# EAGLE board bbotsv2 (EAGLE 9.6.2)
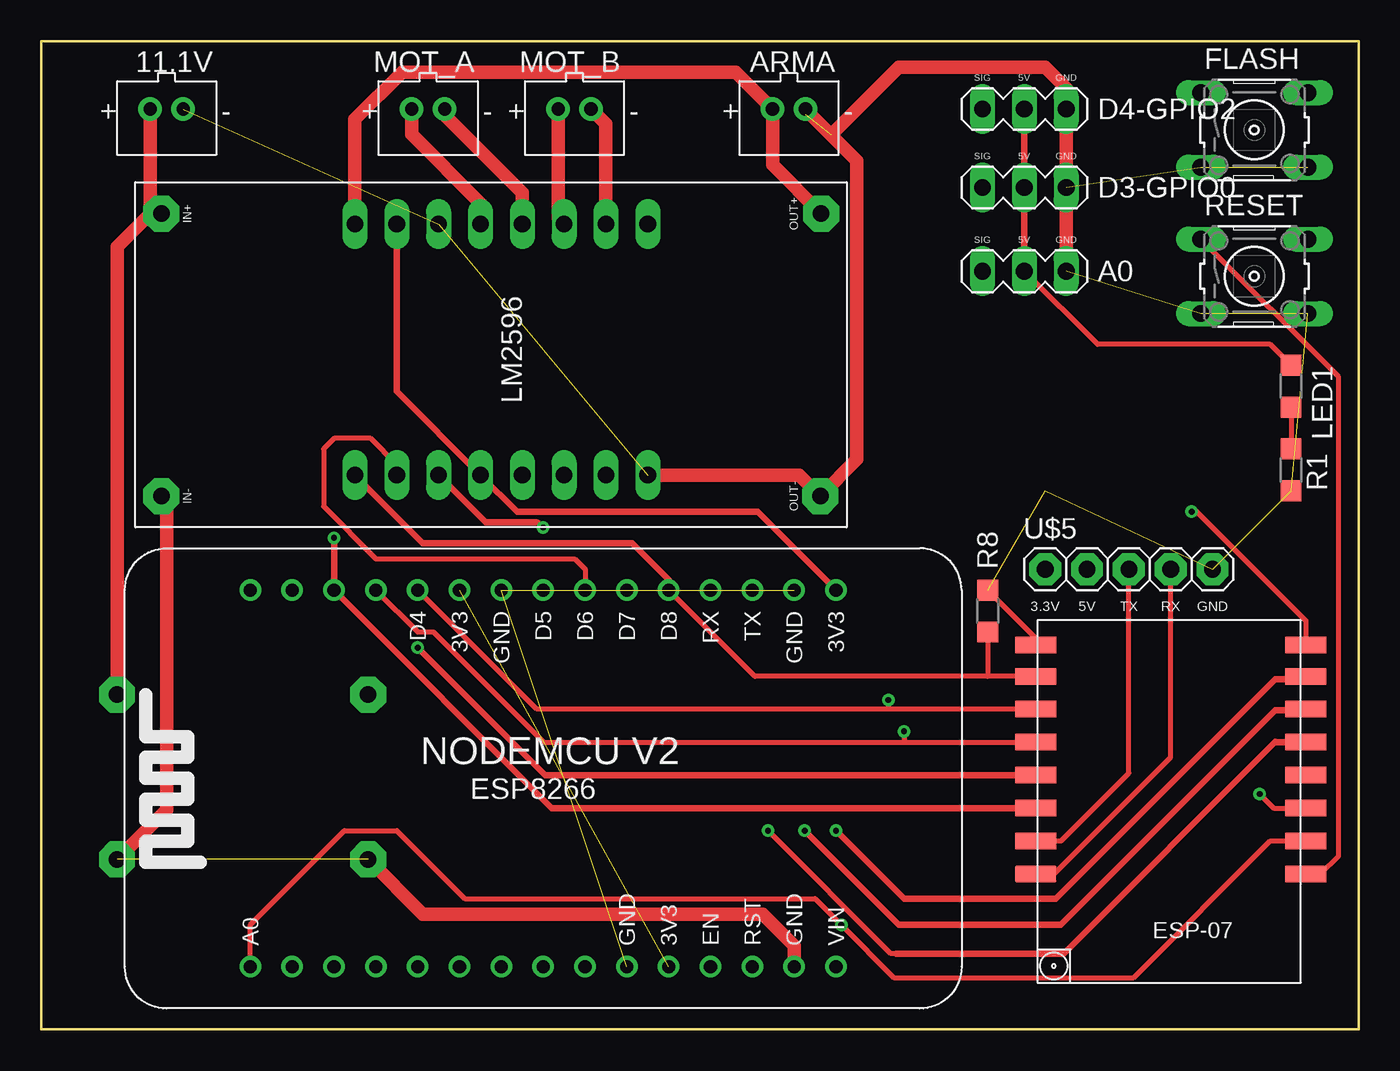
[diagram p0: board, top side]
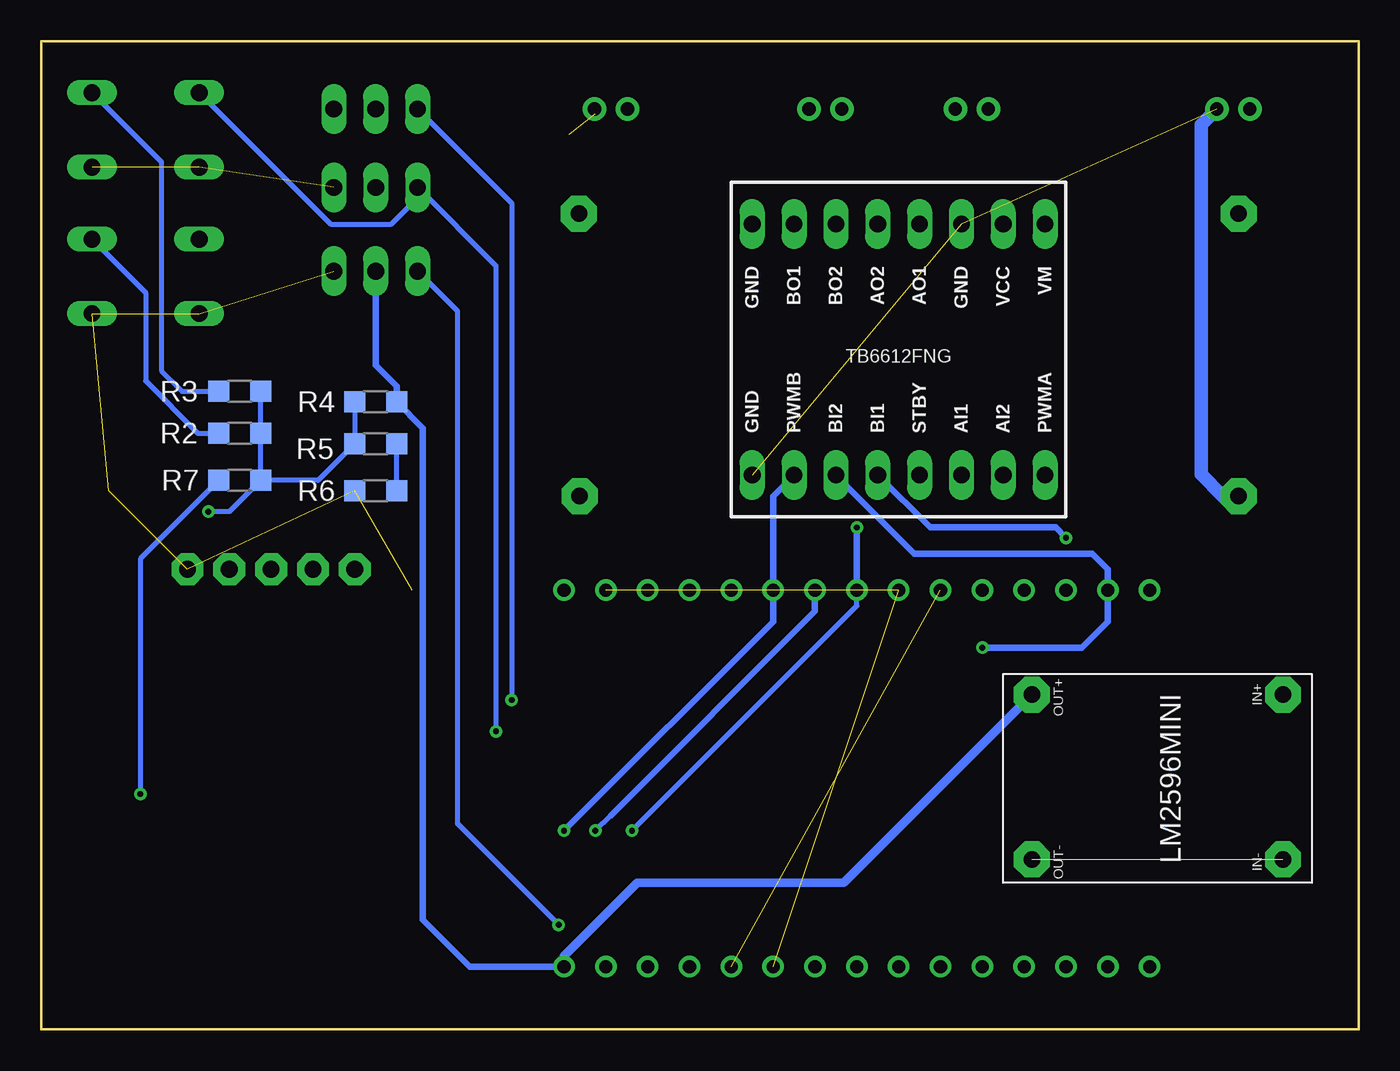
[diagram p1: board, bottom side, seen from below]

Size 80 x 60 mm. Coordinates in mm from the lower left corner, seen from the top.
Outline: 0,60 0,0 80,0 80,60 0,60
Copper layers (1*16): Top 0.035mm / dielectric 1.5mm / Bottom 0.035mm
Design rules "default": minimum track width 6mil, minimum drill 0.35mm, track to track 6mil, track to pad 6mil, pad to pad 6mil, via to via 6mil, smd to smd 6mil, copper to edge 40mil, drill to drill 6mil, minimum pad ring 10mil, minimum via ring 8mil, stop-mask expansion 4mil, vias tented up to drill 0mil, thermal gap 10mil

## Footprints (pad centres in the part's own frame; a part is rotated, then mirrored left to right if it is on the bottom)
JST-PH-2-THM = drill 0.8 pad 1.422: 1 1,0; 2 -1,0
BB-PIN3 = drill 1.016 long: 1 -2.54,0; 2 0,0; 3 2.54,0
B3F-10XX = drill 1.016 long: 1 -3.251,2.261; 2 3.251,2.261; 3 -3.251,-2.261; 4 3.251,-2.261
M0805 = smd 1.27 x 1.27: 1 -1.27,0; 2 1.27,0
NODEMCU_ESP8266 = drill 0.8: 3V3@1 -11.43,19.05; 3V3@2 -11.43,-3.81; 3V3@3 11.43,8.89; A0 11.43,-16.51; CLK 11.43,3.81; CMD 11.43,-1.27; D0 -11.43,-16.51; D1 -11.43,-13.97; D2 -11.43,-11.43; D3 -11.43,-8.89; D4 -11.43,-6.35; D5 -11.43,1.27; D6 -11.43,3.81; D7 -11.43,6.35; D8 -11.43,8.89; EN 11.43,11.43; GND@1 -11.43,16.51; GND@2 -11.43,-1.27; GND@3 11.43,6.35; GND@4 11.43,16.51; RST 11.43,13.97; RSV1 11.43,-11.43; RSV2 11.43,-13.97; RX -11.43,11.43; SD1 11.43,-3.81; SD2 11.43,-6.35; SD3 11.43,-8.89; SDO 11.43,1.27; TX -11.43,13.97; VIN 11.43,19.05
BB-LM2596 = drill 1 pad 2.184 octagon: IN+ 1.905,1.587; IN- 19.05,1.587; OUT+ 1.905,41.643; OUT- 19.05,41.593
BB-TB6612 = drill 1.016 long: AI1 7.62,3.81; AI2 7.62,6.35; AO1 -7.62,1.27; AO2 -7.62,-1.27; BI1 7.62,-1.27; BI2 7.62,-3.81; BO1 -7.62,-6.35; BO2 -7.62,-3.81; GND -7.62,3.81; GND2 -7.62,-8.89; GND3 7.62,-8.89; PWMA 7.62,8.89; PWMB 7.62,-6.35; STBY 7.62,1.27; VCC -7.62,6.35; VM -7.62,8.89
ESP07-16PIN = smd 2.5 x 1: ADC -8.2,3.8; CH_PD -8.2,1.8; GND 8.2,-8.105; GPIO0 8.2,-2.2; GPIO2 8.2,-4.2; GPIO4 8.2,1.8; GPIO5 8.2,-0.2; GPIO12 -8.2,-4.2; GPIO13 -8.2,-6.2; GPIO14 -8.2,-2.2; GPIO15 8.2,-6.2; GPIO16 -8.2,-0.2; REST -8.2,5.8; RX 8.2,3.8; TX 8.2,5.8; VCC -8.2,-8.105
BB-LM2596MINI = drill 1 pad 2.184 octagon: IN+ 1.27,16.986; IN- 11.271,16.986; OUT+ 1.27,1.746; OUT- 11.271,1.746
1X05 = drill 1.016 pad 1.93 octagon: 3.3V -5.08,0; 5V -2.54,0; GND 5.08,0; RX 2.54,0; TX 0,0

## Placement (x,y rotation side)
11.1V  [JST-PH-2-THM]  7.62,55.88 180 top
A0  BB-PIN3  [BB-PIN3]  59.69,46.04 180 top
ARMA  [JST-PH-2-THM]  45.4,55.88 180 top
D3-GPIO0  BB-PIN3  [BB-PIN3]  59.69,51.12 180 top
D4-GPIO2  BB-PIN3  [BB-PIN3]  59.69,55.88 180 top
FLASH  [B3F-10XX]  73.66,54.61 0 top
LED1  [M0805]  75.88,39.05 270 top
MOT_A  [JST-PH-2-THM]  23.5,55.88 180 top
MOT_B  [JST-PH-2-THM]  32.38,55.88 180 top
NODE1  NODEMCU_ESP8266  [NODEMCU_ESP8266]  29.21,15.24 270 top
R1  1k  [M0805]  75.88,33.97 90 top
R2  10k  [M0805]  67.94,36.2 180 bottom
R3  10k  [M0805]  67.94,38.73 180 bottom
R4  10k  [M0805]  59.69,38.1 0 bottom
R5  10k  [M0805]  59.69,35.56 180 bottom
R6  10k  [M0805]  59.69,32.7 0 bottom
R7  10k  [M0805]  67.94,33.34 0 bottom
R8  10k  [M0805]  57.47,25.4 90 top
RESET  [B3F-10XX]  73.66,45.72 0 top
U$1  BB-LM2596  [BB-LM2596]  5.71,51.44 270 top
U$2  BB-TB6612  [BB-TB6612]  27.94,41.27 270 bottom
U$3  ESP07-16PIN  [ESP07-16PIN]  68.58,15.24 180 top
U$4  BB-LM2596MINI  [BB-LM2596MINI]  21.59,21.59 270 bottom
U$5  BB-USBTTL  [1X05]  66.04,27.94 0 top

## Library data of the parts
11.1V ARMA MOT_A MOT_B = adafruit
A0 D3-GPIO0 D4-GPIO2 U$1 U$2 U$4 U$5 = my-library
FLASH RESET = switch-omron; MPN: B3F-1000; OC_FARNELL: 176432; OC_NEWARK: 36M3542
LED1 R1-R8 = my-library; SPICEPREFIX: R
NODE1 = nodemcu_esp8266
U$3 = esp8266modules; DIMENSIONS: 22.0 x 16.0 mm; PINS: 16; PITCH: 0.078" / 2 mm

## Nets
3.3: R2.1 R3.1 R4.1 R5.2 R7.2 U$3.VCC
3V3: NODE1.3V3@2 NODE1.3V3@3
5V: A0.2 D3-GPIO0.2 D4-GPIO2.2 LED1.1 NODE1.VIN R4.2 U$4.OUT+
11.1: 11.1V.1 U$1.IN+ U$4.IN+
12V: ARMA.1 U$1.OUT+ U$2.VM
GND: NODE1.GND@1 NODE1.GND@2 NODE1.GND@3
GND2: 11.1V.2 A0.1 ARMA.2 D3-GPIO0.1 D4-GPIO2.1 FLASH.3 FLASH.4 NODE1.GND@4 R1.1 R6.1 R8.2 RESET.3 RESET.4 U$1.IN- U$1.OUT- U$2.GND U$2.GND3 U$3.GND U$4.IN- U$4.OUT- U$5.GND
N$3: LED1.2 R1.2
N$4: NODE1.D8 R8.1 U$2.PWMA U$3.GPIO15
N$5: NODE1.D7 U$2.PWMB U$3.GPIO13
N$7: NODE1.D6 U$2.AI2 U$3.GPIO12
N$8: NODE1.D5 U$2.AI1 U$3.GPIO14
N$9: NODE1.D2 U$2.BI1 U$3.GPIO4
N$10: NODE1.D1 U$2.BI2 U$3.GPIO5
N$12: D4-GPIO2.3 NODE1.D4 U$3.GPIO2
N$13: MOT_A.2 U$2.AO2
N$14: MOT_A.1 U$2.AO1
N$15: MOT_B.1 U$2.BO2
N$16: MOT_B.2 U$2.BO1
N$17: NODE1.3V3@1 U$2.STBY U$2.VCC
N$18: D3-GPIO0.3 FLASH.1 NODE1.D3 U$3.GPIO0
N$19: U$3.TX U$5.RX
N$20: U$3.RX U$5.TX
N$21: A0.3 NODE1.A0 U$3.ADC
N$22: R2.2 RESET.2
N$23: FLASH.2 R3.2
N$25: R5.1 R6.2
N$27: RESET.1 U$3.REST
N$28: R7.1 U$3.CH_PD

## Tracks (layer width: path | path; a pad name or v marks a point on that pad's centre or on a via)
3.3  (via drill 0.35)
  Top 0.305: v69.85,31.43 70.17,31.43 76.78,24.82 U$3.VCC
  Bottom 0.305: R4.1 R5.2 63.18,33.34 R7.2 | R3.1 R2.1 R7.2 | R7.2 68.58,31.43 v69.85,31.43
3V3  (1 unrouted)
5V
  Top 0.305: LED1.1 74.61,41.59 64.14,41.59 A0.2
  Top 0.406: D4-GPIO2.2 D3-GPIO0.2 A0.2
  Bottom 0.406: A0.2 59.69,40.32 58.42,39.05 R4.2 56.83,36.51 56.83,6.67 53.98,3.81 NODE1.VIN
  Bottom 0.508: U$4.OUT+ 31.27,8.89 43.81,8.89 48.26,4.45 NODE1.VIN
11.1
  Top 0.813: 6.62,49.53 4.6,47.51 U$4.IN+ | 6.62,49.53 11.1V.1 | U$1.IN+ 6.62,49.53
12V
  Top 0.813: U$1.OUT+ 44.4,52.49 ARMA.1 42.18,58.1 21.91,58.1 19.05,55.24 U$2.VM
GND  (2 unrouted)
GND2  (12 unrouted)
  Top 0.305: R8.2 60.38,23.76 U$3.GND
  Top 0.813: 46.4,55.56 ARMA.2 49.53,52.75 49.53,34.61 U$1.OUT- 46.04,33.66 U$2.GND3 | A0.1 D3-GPIO0.1 D4-GPIO2.1 62.23,57.15 60.96,58.42 52.07,58.42 47.97,54.32 | U$4.IN- 7.62,13.34 7.62,32.07 U$1.IN- | U$4.OUT- 23.18,6.99 43.81,6.99 45.72,5.08 NODE1.GND@4
  Bottom 0.813: 11.1V.2 9.57,54.93 9.57,33.7 8.26,32.38 U$1.IN-
N$3
  Top 0.305: LED1.2 R1.2
N$4
  Top 0.305: NODE1.D8 43.33,21.44 57.47,21.44 | U$3.GPIO15 57.47,21.44 | R8.1 57.47,21.44
  Top 0.406: U$2.PWMA 23.18,29.53 35.88,29.53 38.1,27.3 NODE1.D8
N$5  (via drill 0.35)
  Top 0.406: U$3.GPIO13 76.61,21.27 74.93,21.27 61.59,7.94 52.39,7.94 v48.26,12.06
  Bottom 0.406: U$2.PWMB 35.56,32.38 NODE1.D7 35.56,24.77 v48.26,12.06
N$7  (via drill 0.35)
  Top 0.305: U$2.AI2 21.59,34.29 20,35.88 17.78,35.88 17.14,35.24 17.14,31.75 20.32,28.57 32.38,28.57 33.02,27.94 NODE1.D6
  Top 0.406: U$3.GPIO12 76.71,19.37 74.93,19.37 61.91,6.35 52.07,6.35 v46.35,12.06
  Bottom 0.305: 45.4,13.02 v46.35,12.06
  Bottom 0.406: 45.4,13.02 33.02,25.4 NODE1.D6
N$8  (via drill 0.35)
  Top 0.305: 52.07,4.6 51.59,4.6 v44.13,12.06 | 30.06,30.8 30.16,30.8 v30.48,30.48
  Top 0.406: U$2.AI1 26.99,30.8 30.06,30.8 | U$3.GPIO14 74.95,17.44 74.93,17.46 62.07,4.6 52.07,4.6 51.91,4.6
  Bottom 0.305: v44.13,12.06 30.48,25.72 NODE1.D5
  Bottom 0.406: NODE1.D5 v30.48,30.48
N$9  (via drill 0.35)
  Top 0.406: U$3.GPIO4 31.01,13.44 NODE1.D2 v17.78,29.84
  Bottom 0.406: U$2.BI1 26.04,30.48 18.41,30.48 v17.78,29.84
N$10  (via drill 0.35)
  Top 0.406: U$3.GPIO5 30.6,15.44 v22.86,23.18
  Bottom 0.406: U$2.BI2 26.99,28.89 16.19,28.89 15.24,27.94 NODE1.D1 15.24,24.77 16.83,23.18 v22.86,23.18
N$12  (via drill 0.35)
  Top 0.305: U$3.GPIO2 51.44,19.44 | 51.44,19.44 30.09,19.44 NODE1.D4 | v51.44,20 51.44,19.44
  Bottom 0.305: D4-GPIO2.3 51.44,50.16 v51.44,20
N$13
  Top 0.813: MOT_A.2 24.5,55.52 29.21,50.8 U$2.AO2
N$14
  Top 0.813: U$2.AO1 26.67,50.16 22.5,54.34 MOT_A.1
N$15
  Top 0.813: U$2.BO2 31.39,49.26 MOT_B.1
N$16
  Top 0.813: MOT_B.2 34.29,54.98 U$2.BO1
N$17
  Top 0.406: NODE1.3V3@1 43.5,31.43 28.89,31.43 U$2.STBY 21.59,38.73 U$2.VCC
N$18  (via drill 0.35)
  Top 0.305: NODE1.D3 22.86,24.13 23.81,24.13 30.5,17.44 52.39,17.44 | 52.39,17.44 U$3.GPIO0 | v52.39,18.1 52.39,17.44
  Bottom 0.305: FLASH.1 62.43,48.9 58.74,48.9 57.15,50.48 D3-GPIO0.3 52.39,46.35 v52.39,18.1
N$19
  Top 0.305: U$3.TX 61.51,9.44 68.58,16.51 U$5.RX
N$20
  Top 0.305: U$3.RX 61.92,11.44 66.04,15.56 U$5.TX
N$21  (via drill 0.35)
  Top 0.305: NODE1.A0 12.7,6.35 18.41,12.06 21.59,12.06 25.72,7.94 46.99,7.94 v48.58,6.35 51.78,3.15 66.33,3.15 74.62,11.44 U$3.ADC
  Bottom 0.305: A0.3 54.74,43.62 54.74,12.51 v48.58,6.35
N$22
  Bottom 0.305: RESET.2 73.66,44.73 73.66,39.37 70.48,36.2 R2.2
N$23
  Bottom 0.305: FLASH.2 72.71,52.67 72.71,40.01 71.44,38.73 R3.2
N$25
  Bottom 0.305: R6.2 R5.1
N$27
  Top 0.305: RESET.1 78.74,39.65 78.74,10.48 77.7,9.44 U$3.REST
N$28  (via drill 0.35)
  Top 0.305: v73.98,14.29 74.83,13.44 U$3.CH_PD
  Bottom 0.305: R7.1 73.98,28.57 v73.98,14.29